# EAGLE board single_layer (EAGLE 6.5.0)
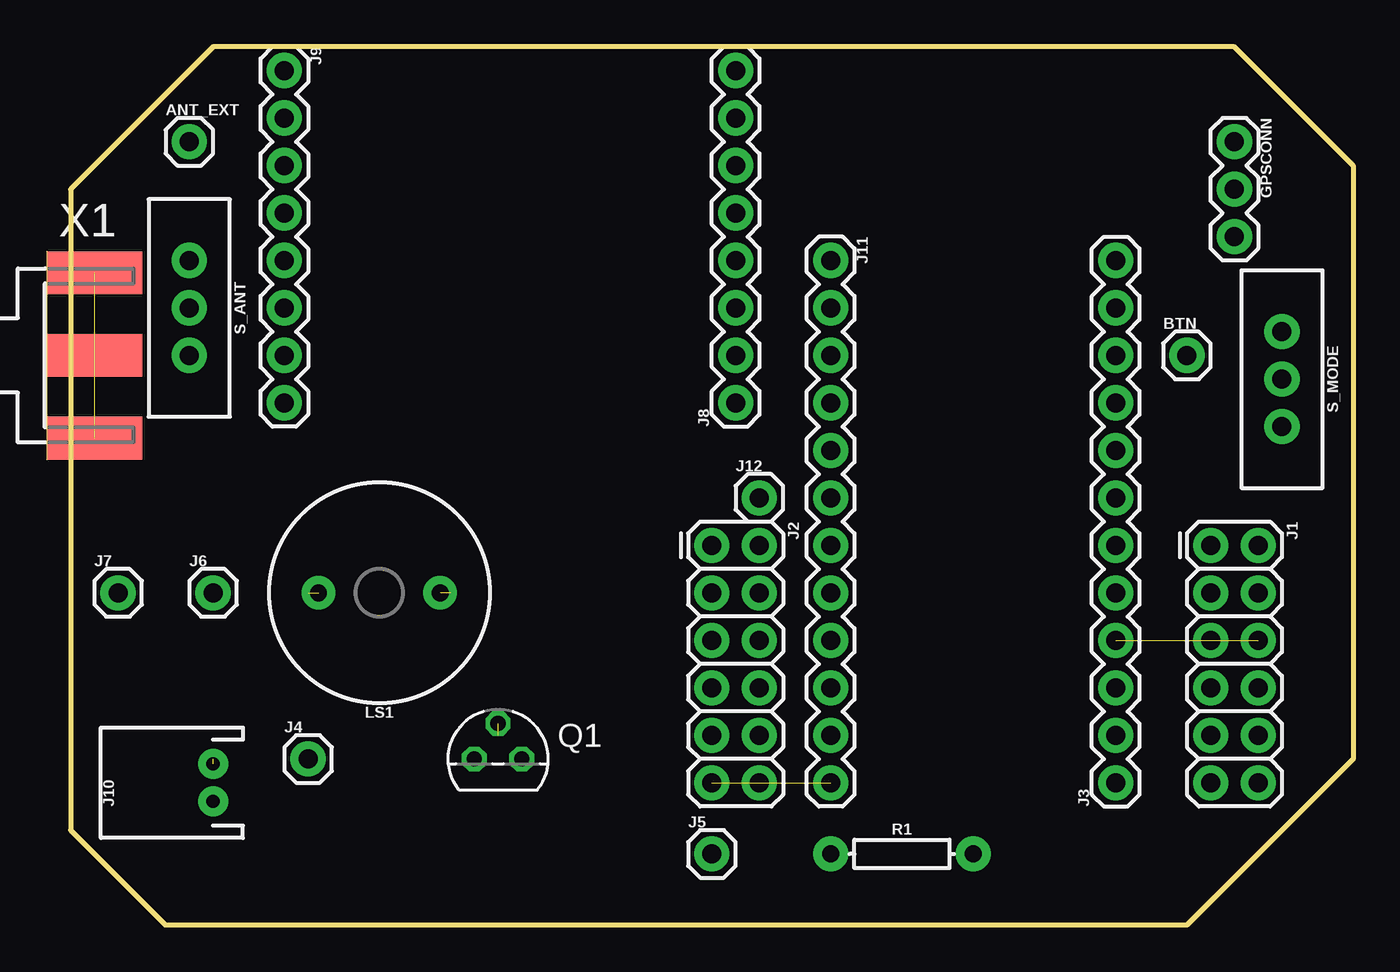
[diagram p0: board, top side]
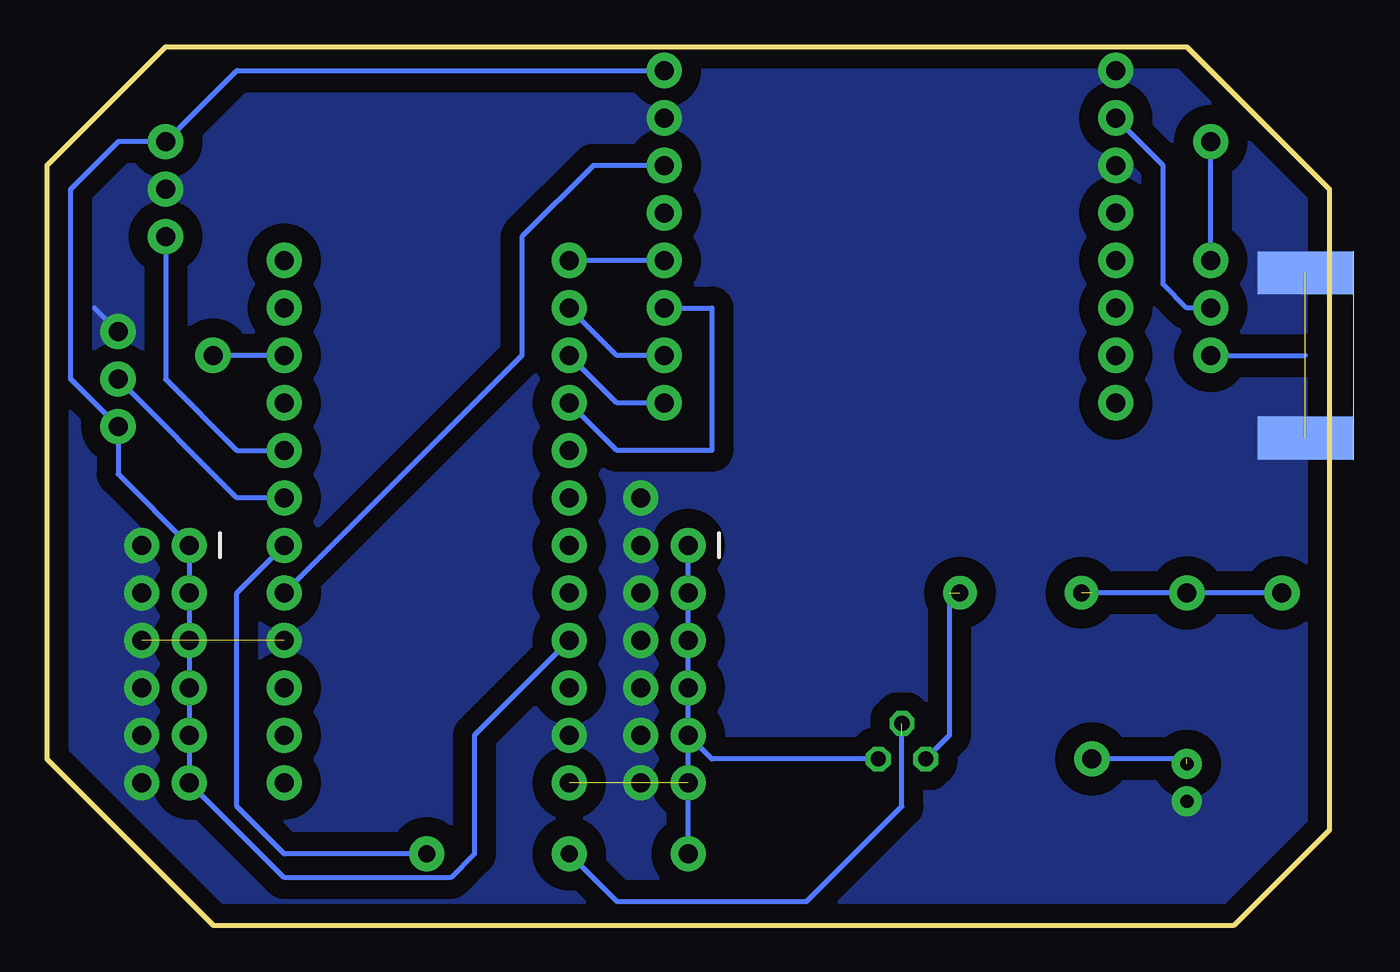
[diagram p1: board, bottom side, seen from below]

Size 68.58 x 46.99 mm. Coordinates in mm from the lower left corner, seen from the top.
Outline: 68.58,8.89 59.69,0 5.08,0 0,5.08 0,39.37 7.62,46.99 62.23,46.99 68.58,40.64 68.58,8.89
Copper layers (1*16): Top 0.035mm / dielectric 1.5mm / Bottom 0.035mm
Design rules "default": minimum track width 10mil, minimum drill 24mil, track to track 8mil, track to pad 8mil, pad to pad 8mil, via to via 8mil, smd to smd 8mil, copper to edge 40mil, drill to drill 8mil, minimum pad ring 10mil, minimum via ring 8mil, stop-mask expansion 4mil, vias tented up to drill 0mil, thermal gap 10mil

## Footprints (pad centres in the part's own frame; a part is rotated, then mirrored left to right if it is on the bottom)
1X01 = drill 1.016 pad 1.88: 1 0,0
1X03 = drill 1.016 pad 1.88: 1 0,0; 2 2.54,0; 3 5.08,0
2X6 = drill 1.016 pad 1.88: 1 0,0; 2 0,2.54; 3 2.54,0; 4 2.54,2.54; 5 5.08,0; 6 5.08,2.54; 7 7.62,0; 8 7.62,2.54; 9 10.16,0; 10 10.16,2.54; 11 12.7,0; 12 12.7,2.54
1X12 = drill 1.016 pad 1.88: 1 0,0; 2 2.54,0; 3 5.08,0; 4 7.62,0; 5 10.16,0; 6 12.7,0; 7 15.24,0; 8 17.78,0; 9 20.32,0; 10 22.86,0; 11 25.4,0; 12 27.94,0
1X08 = drill 1.016 pad 1.88: 1 0,0; 2 2.54,0; 3 5.08,0; 4 7.62,0; 5 10.16,0; 6 12.7,0; 7 15.24,0; 8 17.78,0
JST-2-PTH = drill 0.7 pad 1.6: 1 -1,0; 2 1,0
BUZZER-12MM = drill 0.9 pad 1.778: + 3.25,0; - -3.25,0
TO92 = drill 0.813 octagon: 1 1.27,0; 2 0,1.905; 3 -1.27,0
AXIAL-0.3 = drill 0.9 pad 1.88: P$1 -3.81,0; P$2 3.81,0
SWITCH_SPDT_PTH_11.6X4.0MM = drill 1.016 pad 1.88: 1 0,2.54; 2 0,0; 3 0,-2.54
J502-ND-142-0701-851/861 = smd 5.08 x 2.286: 1 2.565,0; G@1 2.565,4.42; G@2 2.565,-4.42 | smd 5.08 x 2.286 bottom: G@3 2.565,4.42; G@4 2.565,-4.42

## Placement (x,y rotation side)
ANT_EXT  [1X01]  6.35,41.91 0 top
BTN  [1X01]  59.69,30.48 0 top
GPSCONN  [1X03]  62.23,41.91 270 top
J1  2X6 FEMALE  [2X6]  60.96,20.32 270 top
J2  2X6 FEMALE  [2X6]  34.29,20.32 270 top
J3  [1X12]  55.88,7.62 90 top
J4  [1X01]  12.7,8.89 0 top
J5  [1X01]  34.29,3.81 0 top
J6  [1X01]  7.62,17.78 0 top
J7  [1X01]  2.54,17.78 0 top
J8  [1X08]  35.56,27.94 90 top
J9  [1X08]  11.43,45.72 270 top
J10  [JST-2-PTH]  7.62,7.62 90 top
J11  [1X12]  40.64,35.56 270 top
J12  [1X01]  36.83,22.86 0 top
LS1  BUZZER-PTH  [BUZZER-12MM]  16.51,17.78 180 top
Q1  2N3906  [TO92]  22.86,8.89 0 top
R1  10k  [AXIAL-0.3]  44.45,3.81 0 top
S_ANT  [SWITCH_SPDT_PTH_11.6X4.0MM]  6.35,33.02 180 top
S_MODE  [SWITCH_SPDT_PTH_11.6X4.0MM]  64.77,29.21 180 top
X1  SMA-142-0701-851/861  [J502-ND-142-0701-851/861]  -1.27,30.48 0 top

## Library data of the parts
ANT_EXT BTN GPSCONN J3-J7 J11 J12 = SparkFun-Connectors
J1 J2 = SparkFun-Connectors; PROD_ID: CONN-12423
J8 J9 = SparkFun-Connectors; PROD_ID: CONN-08438
J10 = SparkFun-Connectors; PROD_ID: CONN-09863; SKU: PRT-09914
LS1 = SparkFun-Electromechanical; PROD_ID: COMP-08253; SF_SKU: COM-07950
Q1 = transistor-pnp
R1 = SparkFun-Resistors; PROD_ID: RES-08375
S_ANT S_MODE = SparkFun-Switches; PROD_ID: SWCH-08261; SF_SKU: COM-00102
X1 = con-coax; MF: JOHNSON COMPONENTS; MPN: 142-0701-851; OC_FARNELL: 1019325; OC_NEWARK: 99F6798

## Nets
7: J3.7 S_MODE.2
8: GPSCONN.3 J3.8
10: BTN.1 J3.10
ANT: J9.2 S_ANT.2
DIO0: J3.5 J8.6
GND: GPSCONN.2 J1.2 J1.4 J1.6 J1.8 J1.10 J1.12 J2.2 J2.4 J2.6 J2.8 J2.10 J2.12 J3.4 J8.7 J9.1 J9.3 J10.1 J11.11 J12.1 S_MODE.3 X1.G@1 X1.G@2 X1.G@3 X1.G@4
MISO: J8.1 J11.3
MOSI: J8.2 J11.2
N$1: Q1.2 R1.P$1
N$3: LS1.- Q1.3
N$7: ANT_EXT.1 S_ANT.3
N$8: S_ANT.1 X1.1
N$10: J4.1 J10.2
N$11: J6.1 J7.1 LS1.+
NSS: J8.4 J11.1
RAW: J2.1 J2.3 J2.5 J2.7 J2.9 J2.11 J5.1 J11.12 Q1.1
SCK: J8.3 J11.4
SPKR: J3.6 R1.P$2
VCC: GPSCONN.1 J1.1 J1.3 J1.5 J1.7 J1.9 J1.11 J8.8 J11.9 S_MODE.1

## Tracks (layer width: path | path; a pad name or v marks a point on that pad's centre or on a via)
7
  Bottom 0.254: J3.7 58.42,22.86 S_MODE.2
8
  Bottom 0.254: GPSCONN.3 62.23,29.21 58.42,25.4 J3.8
10
  Bottom 0.254: J3.10 BTN.1
ANT
  Bottom 0.254: S_ANT.2 7.62,33.02 8.89,34.29 8.89,40.64 J9.2
DIO0
  Bottom 0.254: J8.6 39.37,40.64 43.18,36.83 43.18,30.48 J3.5
GND  (4 unrouted)
  Bottom 0.254: S_MODE.3 66.04,33.02
  pour Bottom (isolate 1.016, no thermals): 1.27,39.37 8.89,46.99 60.96,46.99 62.23,45.72 68.58,39.37 68.58,10.16 67.31,8.89 58.42,0 6.35,0 1.27,5.08
MISO
  Bottom 0.254: J8.1 38.1,27.94 J11.3
MOSI
  Bottom 0.254: J8.2 38.1,30.48 J11.2
N$1  (1 unrouted)
  Bottom 0.254: 22.86,10.16 22.86,6.35 27.94,1.27 38.1,1.27 R1.P$1
N$3  (1 unrouted)
  Bottom 0.254: 20.32,17.78 20.32,10.16 Q1.3
N$7
  Bottom 0.254: S_ANT.3 ANT_EXT.1
N$8  (1 unrouted)
  Bottom 0.254: S_ANT.1 1.27,30.48
N$10  (1 unrouted)
  Bottom 0.254: 7.62,8.89 J4.1
N$11  (1 unrouted)
  Bottom 0.254: J7.1 J6.1 12.7,17.78
NSS
  Bottom 0.254: J8.4 J11.1
RAW  (1 unrouted)
  Bottom 0.254: J5.1 J2.11 J2.9 | J2.9 J2.7 J2.5 J2.3 J2.1 | Q1.1 33.02,8.89 J2.9
SCK
  Bottom 0.254: J8.3 33.02,33.02 33.02,25.4 38.1,25.4 J11.4
SPKR
  Bottom 0.254: R1.P$2 55.88,3.81 58.42,6.35 58.42,17.78 J3.6
VCC
  Bottom 0.254: J11.9 45.72,10.16 45.72,3.81 46.99,2.54 55.88,2.54 J1.11 J1.9 J1.7 J1.5 J1.3 J1.1 64.77,24.13 S_MODE.1 67.31,29.21 67.31,39.37 64.77,41.91 GPSCONN.1 58.42,45.72 J8.8